# Altium PCB CPUEX-010.PcbDoc
Units mil, origin at the board's own origin, x right, y up, seen from the top; angles counter-clockwise.
Board outline 1270 x 1770 mil, 2 copper layers (Top Layer, Bottom Layer), stack 62.8 mil thick; 31 components, 46 nets, 150 pads, 15 vias.
Unrouted connection lines stored in the file: 57.
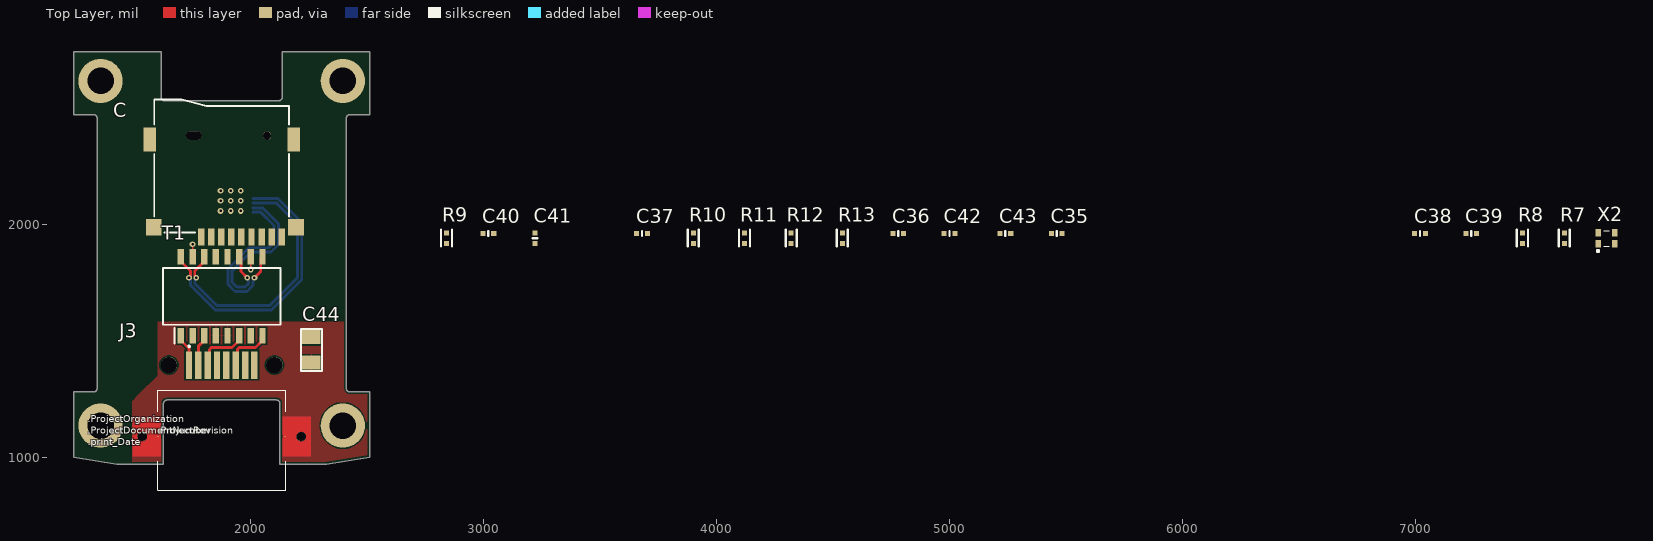
[diagram p0: Top Layer view]
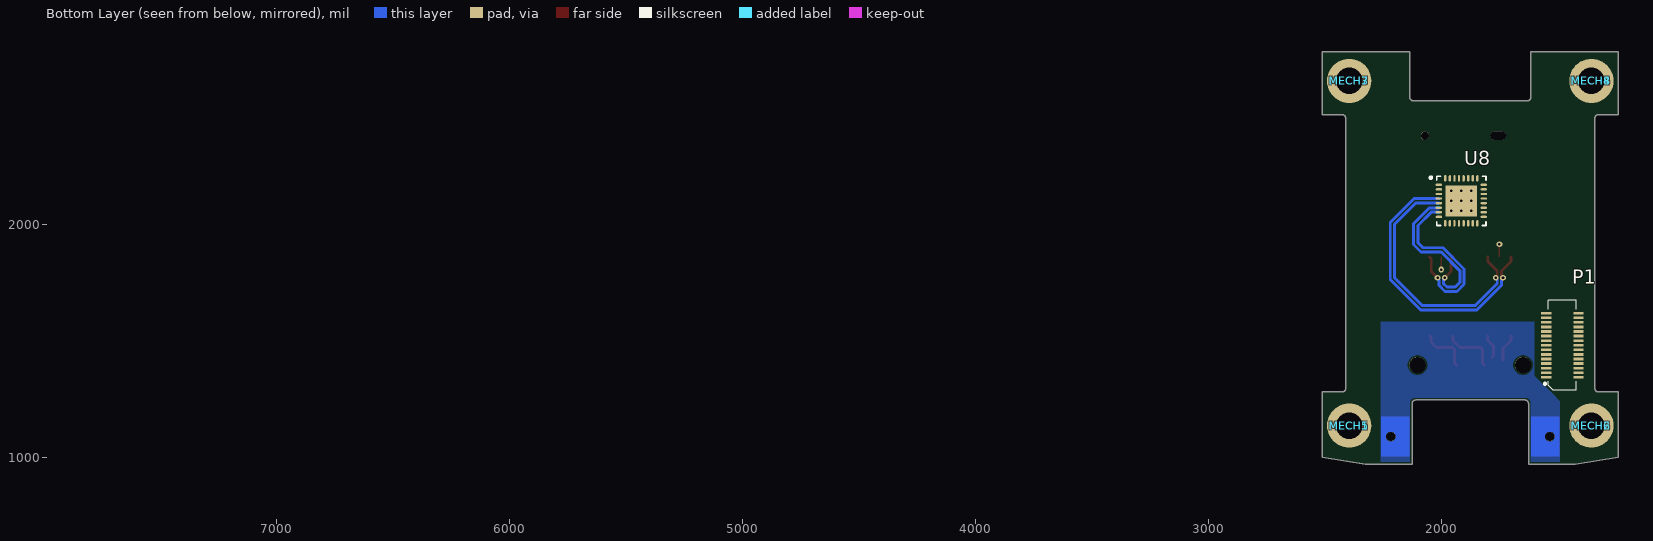
[diagram p1: Bottom Layer view, seen from below]

## Layer stack, top to bottom
Top Solder: solder mask 0.5, Solder Resist, Dk 3.5
Top Layer: signal copper 1.4
Dielectric 1: core 60, FR-4, Dk 4.6
Bottom Layer: signal copper 1.4
Bottom Solder: solder mask 0.5, Solder Resist, Dk 3.5

## Board outline
1240,1000 1240,1280 1325,1280 ccw(c1325,1295) 1340,1295 1340,2455 ccw(c1325,2455) 1325,2470 1240,2470 1240,2740 1615,2740 1615,2545 ccw(c1630,2545) 1630,2530 2120,2530 ccw(c2120,2545) 2135,2545 2135,2740 2510,2740 2510,2470 2425,2470 ccw(c2425,2455) 2410,2455 2410,1295 ccw(c2425,1295) 2425,1280 2510,1280 2510,1000 2325,970 2125,970 2125,1230 ccw(c2110,1230) 2110,1245 1640,1245 ccw(c1640,1230) 1625,1230 1625,970 1425,970

## Design rules (kind name [scope] priority, off if disabled: settings)
AssemblyTestPointUsage AssemblyTestPointUsage_1 [All] p2:
AssemblyTestpoint AssemblyTestpoint_1 [All] p2: testpointundercomponent=TRUE minsize=40 maxsize=100 preferedsize=60 minholesize=0 maxholesize=40 preferedholesize=32 testpointgrid=1 usegrid=TRUE gridtolerance=0.01 allowsidetop=TRUE allowsidebottom=TRUE
BoardOutlineClearance [All] p1: gap=10 ignorepadtopadclearanceinfootprint=FALSE
Clearance [All] p1: gap=6 ignorepadtopadclearanceinfootprint=FALSE except(0: Arc-Hole Track-Hole SMDPad-Hole THPad-Hole Via-Hole Fill-Hole Poly-Hole Region-Hole Text-Hole)
ComponentClearance [All] p1: gap=10 collisioncheckmode=3 verticalgap=50 showdistances=FALSE
DiffPairsRouting [All] p1: maxlimit=6 minlimit=6 mostfreqgap=6 toplayer_minwidth=12.57 toplayer_maxwidth=12.57 toplayer_prefwidth=14.24 bottomlayer_minwidth=12.57 bottomlayer_maxwidth=12.57 bottomlayer_prefwidth=14.24 impedanceprofiledriven=TRUE impedanceprofileid={3162B924-8DB4-4B85-B7C6-C3A51DCF2030} impedanceprofilevalue=100.000000 maxuncoupledlength=500
FabricationTestPointUsage FabricationTestPointUsage_1 [All] p2: valid=0 allowmultiple=FALSE
FabricationTestpoint FabricationTestpoint_1 [All] p2: side=3 testpointundercomponent=TRUE minsize=40 maxsize=100 preferedsize=60 minholesize=0 maxholesize=40 preferedholesize=32 testpointgrid=1 allowsidetop=TRUE allowsidebottom=TRUE usegrid=TRUE gridtolerance=0.01
Height Height_Bottom [TouchesRoom('BoardHeight_Bottom') and OnBottom and not ((Name='P1') or Name='Mech*' )] p1: minheight=0 maxheight=75 prefheight=0
Height Height_Top [TouchesRoom('BoardHeight_Top') and OnBottom] p2: minheight=0 maxheight=400 prefheight=0
HoleSize [All] p1: absolutevalues=TRUE maxlimit=130 minlimit=10 maxpercent=80.000 minpercent=20.000
MinimumSolderMaskSliver [All] p1: minsoldermaskwidth=3.94
PolygonConnect [All] p1: thpad.connectstyle=Relief thpad.reliefconductorwidth=6 thpad.reliefentries=4 thpad.polygonreliefangle="90 Angle" thpad.airgapwidth=6 smdpad.connectstyle=Relief smdpad.reliefconductorwidth=6 smdpad.reliefentries=4 smdpad.polygonreliefangle="90 Angle" smdpad.airgapwidth=6 via.connectstyle=Direct via.reliefconductorwidth=10 via.reliefentries=4 via.polygonreliefangle="90 Angle" via.airgapwidth=10
RoomDefinition BoardHeight_Bottom [False] p1: confinementstyle=ConfineIn formatcopy=TRUE lockcomponents=FALSE outline 1000,2750 2750,2750 2750,1000 1000,1000
RoomDefinition BoardHeight_Top [False] p2: confinementstyle=ConfineIn formatcopy=TRUE lockcomponents=FALSE outline 2750,2750 1000,2750 1000,1000 2750,1000
RoutingVias [All] p1: holewidth=10 width=25 viastyle="Through Hole" minholewidth=10 minwidth=25 maxholewidth=28 maxwidth=50
SilkToBoardRegionClearance SilkToBoardRegionClearance_1 [All] p2:
SilkToSilkClearance [All] p1: silktosilkclearance=2
SilkToSolderMaskClearance [IsPad] p1: minsilkscreentomaskgap=4 clearancetoexposedcopper=TRUE
SolderMaskExpansion [All] p1: expansion=1.97 istentingtop=FALSE
UnRoutedNet [All] p1: checkbadconnections=TRUE
Width "Schematic Width Constraint_3" [InNet('NetR7_1')] p1: maxlimit=10 minlimit=10 preferedwidth=10
Width "Schematic Width Constraint_2" [InNet('ETH_OSC')] p2: maxlimit=10 minlimit=10 preferedwidth=10
Width Width_1 [All] p3: maxlimit=100 minlimit=6 preferedwidth=10
22 further rules are at their usual default settings.

## Classes and differential pairs
differential pair TX: +TX_P -TX_N
differential pair TD: +TD_P -TD_N
differential pair RX: +RX_P -RX_N
differential pair RD: +RD_P -RD_N

## Components (designator, comment, footprint, x,y, rotation, side; value= is the part's Value field where it differs from the comment)
C "693071020811" 693071020811 1875,2250 r180 top (schematic designator J1)
C35 "0.10µF" SMD-0402C 5460,1960 r90 top
C36 "0.10µF" SMD-0402C 4780,1960 r90 top
C37 "0.10µF" SMD-0402C 3680,1960 r90 top
C38 "0.10µF" SMD-0402C 7020,1960 r90 top
C39 "10000pF" SMD-0402C 7240,1960 r90 top
C40 "0.10µF" SMD-0402C 3020,1960 r90 top
C41 "0.10µF" SMD-0402C 3220,1940 r0 top
C42 "0.10µF" SMD-0402C 5000,1960 r90 top
C43 "0.10µF" SMD-0402C 5240,1960 r90 top
C44 "C1206C102KGRACAUTO" SMD-1206C 2260,1460 r0 top value=1nF
J3 "2041126-1" TE_2041126-1 1875,1395 r0 top
MECH1 "94669A096" 94669A096 2395,1135 r90 bottom
MECH2 "94669A096" 94669A096 1355,1135 r90 bottom
MECH3 "94669A096" 94669A096 2395,2615 r90 bottom
MECH4 "94669A096" 94669A096 1355,2615 r90 bottom
MECH5 "90576A161" 90576A161 2395,1135 r180 bottom
MECH6 "90576A161" 90576A161 1355,1135 r180 bottom
MECH7 "90576A161" 90576A161 2395,2615 r180 bottom
MECH8 "90576A161" 90576A161 1355,2615 r180 bottom
P1 "501920-3001" 5019203001 1480,1480 r270 bottom
R7 "22" SMD-0402-RES 7640,1940 r0 top
R8 "1k" SMD-0402-RES 7460,1940 r0 top
R9 "60.4k" SMD-0402-RES 2840,1940 r0 top
R10 "75" SMD-0402-RES 3900,1940 r0 top
R11 "75" SMD-0402-RES 4120,1940 r0 top
R12 "75" SMD-0402-RES 4320,1940 r0 top
R13 "75" SMD-0402-RES 4540,1940 r0 top
T1 "PT61018AAPEL-S" SOIC127P930X590-16N 1875,1690 r90 top
U8 "KSZ8061RNBV" "QFN50P500X500X90_HS-33N (KSZ8061RNBV)" 1913.54,2100.16 r180 bottom
X2 "MC2016K25.0000C16ESH" MC2016 7820,1940 r0 top

## Footprints (in the part's own frame and the unit in brackets; to place one, negate y for a bottom-side part, rotate by r counter-clockwise, add the part's x,y. Pads: shape width x height; smd on the part's side, far side on the other; paste and mask are expansions set on the pad)
90576A161 [mil]
  body extent -98,-114 98,114, height 372
94669A096 [mil]
  body extent -89,-89 89,89, height 157
5019203001 [mm]
  rect 0.3x1.1 smd: 1(3.5,-1.75) 2(3.5,1.75) 3(3,-1.75) 4(3,1.75) 5(2.5,-1.75) 6(2.5,1.75) 7(2,-1.75) 8(2,1.75) 9(1.5,-1.75) 10(1.5,1.75) 11(1,-1.75) 12(1,1.75) 13(0.5,-1.75) 14(0.5,1.75) 15(0,-1.75) 16(0,1.75) 17(-0.5,-1.75) 18(-0.5,1.75) 19(-1,-1.75) 20(-1,1.75) 21(-1.5,-1.75) 22(-1.5,1.75) 23(-2,-1.75) 24(-2,1.75) 25(-2.5,-1.75) 26(-2.5,1.75) 27(-3,-1.75) 28(-3,1.75) 29(-3.5,-1.75) 30(-3.5,1.75)
  silkscreen extent -4.9,-2 4.9,1.55, body extent -4.9,-2.05 4.9,2.05, height 3.42
693071020811 [mm] "Micro SD Card Connector Push & Push - with Card Detection - 8 Pins"
  rect 0.7x1.9 smd: 1(2.25,7.75) 2(1.15,7.75) 3(0.05,7.75) 4(-1.05,7.75) 5(-2.15,7.75) 6(-3.25,7.75) 7(-4.35,7.75) 8(-5.45,7.75) 9(-6.55,7.75)
  rect 1.7x1.8 smd: 10(-8.1,6.7) 11(7.4,6.7)
  rect 1.4x2.6 smd: 12(-7.85,-2.9) 13(7.85,-2.9)
  round 0.9 hole 0.9 unplated: MH1(-4.95,-3.3)
  oval 1.7x0.9 hole 0.9 slot 1.7 at 0 deg unplated: MH2(3.05,-3.3)
  silkscreen extent -7.35,-7.25 7.35,7.25, body extent -8.2,-7.3 8.2,7.73, height 1.85
MC2016 [mm]
  rect 0.6x0.8 smd: 1(-0.9,-0.6) 2(0.9,-0.6) 3(0.9,0.6) 4(-0.9,0.6)
  silkscreen extent -1,-1.5 0.3,0.8, body extent -1,-0.8 1,0.8, height 0.4
"QFN50P500X500X90_HS-33N (KSZ8061RNBV)" [mm] "QFN, 32-Leads, Body 5.00x5.00mm, Pitch 0.50mm, Thermal Pad 3.40x3.40mm, IPC Medium Density"
  oval 0.7x0.25 smd: 1(-2.45,1.75) 2(-2.45,1.25) 3(-2.45,0.75) 4(-2.45,0.25) 5(-2.45,-0.25) 6(-2.45,-0.75) 7(-2.45,-1.25) 8(-2.45,-1.75) 17(2.45,-1.75) 18(2.45,-1.25) 19(2.45,-0.75) 20(2.45,-0.25) 21(2.45,0.25) 22(2.45,0.75) 23(2.45,1.25) 24(2.45,1.75)
  oval 0.25x0.7 smd: 9(-1.75,-2.45) 10(-1.25,-2.45) 11(-0.75,-2.45) 12(-0.25,-2.45) 13(0.25,-2.45) 14(0.75,-2.45) 15(1.25,-2.45) 16(1.75,-2.45) 25(1.75,2.45) 26(1.25,2.45) 27(0.75,2.45) 28(0.25,2.45) 29(-0.25,2.45) 30(-0.75,2.45) 31(-1.25,2.45) 32(-1.75,2.45)
  rect 3.4x3.4 smd: 33(0,0)
  silkscreen extent -3.45,-2.68 2.68,2.68, body extent -2.56,-2.56 2.56,2.56, height 0.9
SMD-0402-RES [mm]
  rect 0.55x0.55 smd: 1(0,0.584) 2(0,-0.584)
  silkscreen extent -0.6,-0.9 0.6,0.9, body extent -0.28,-0.57 0.27,0.58, height 0.41
SMD-0402C [mm]
  rect 0.55x0.55 smd: 1(0,0.584) 2(0,-0.584)
  silkscreen extent -0.25,0 0.25,0, body extent -0.25,-0.51 0.25,0.51, height 0.51
SMD-1206C [mil]
  rect 80x60 smd: 1(0,55) 2(0,-55)
  silkscreen extent -45,-90 45,90, body extent -31,-63 32,63, height 39
SOIC127P930X590-16N [mm]
  rect 1.7x0.7 smd: 1(-4.3,4.445) 2(-4.3,3.175) 3(-4.3,1.905) 4(-4.3,0.635) 5(-4.3,-0.635) 6(-4.3,-1.905) 7(-4.3,-3.175) 8(-4.3,-4.445) 9(4.3,-4.445) 10(4.3,-3.175) 11(4.3,-1.905) 12(4.3,-0.635) 13(4.3,0.635) 14(4.3,1.905) 15(4.3,3.175) 16(4.3,4.445)
  silkscreen extent -5.15,-6.4 3.1,6.4, body extent -4.65,-6.4 4.65,6.4, height 5.9
TE_2041126-1 [mm]
  rect 0.7x3 smd: 1(-3.57,0) 2(-2.55,0) 3(-1.53,0) 4(-0.51,0) 5(0.51,0) 6(1.53,0) 7(2.55,0) 8(3.57,0)
  round 1 hole 1 unplated: MH1(-8.675,-7.8) MH2(8.675,-7.8)
  rect 0.1x0.1 smd paste-1 mask+0: MH1(-6.925,-7.8) MH2(6.925,-7.8)
  round 1.8 hole 1.8 unplated: ""(-5.75,0) ""(5.75,0)
  Top Layer region: -6.65,-9.95 -9.7,-9.95 -9.7,-7.8 -9.7,-5.65 -6.65,-5.65 hole: -8.675,-7.3 -8.701,-7.301 -8.727,-7.303 -8.753,-7.306 -8.779,-7.311 -8.804,-7.317 -8.83,-7.324 -8.854,-7.333 -8.878,-7.343 -8.902,-7.354 -8.925,-7.367 -8.947,-7.381 -8.969,-7.395 -8.99,-7.411 -9.01,-7.428 -9.029,-7.446 -9.047,-7.465 -9.064,-7.485 -9.08,-7.506 -9.094,-7.528 -9.108,-7.55 -9.121,-7.573 -9.132,-7.597 -9.142,-7.621 -9.151,-7.645 -9.158,-7.671 -9.164,-7.696 -9.169,-7.722 -9.172,-7.748 -9.174,-7.774 -9.175,-7.8 -9.174,-7.826 -9.172,-7.852 -9.169,-7.878 -9.164,-7.904 -9.158,-7.929 -9.151,-7.955 -9.142,-7.979 -9.132,-8.003 -9.121,-8.027 -9.108,-8.05 -9.094,-8.072 -9.08,-8.094 -9.064,-8.115 -9.047,-8.135 -9.029,-8.154 -9.01,-8.172 -8.99,-8.189 -8.969,-8.205 -8.947,-8.219 -8.925,-8.233 -8.902,-8.246 -8.878,-8.257 -8.854,-8.267 -8.83,-8.276 -8.804,-8.283 -8.779,-8.289 -8.753,-8.294 -8.727,-8.297 -8.701,-8.299 -8.675,-8.3 -8.649,-8.299 -8.623,-8.297 -8.597,-8.294 -8.571,-8.289 -8.546,-8.283 -8.52,-8.276 -8.496,-8.267 -8.472,-8.257 -8.448,-8.246 -8.425,-8.233 -8.403,-8.219 -8.381,-8.205 -8.36,-8.189 -8.34,-8.172 -8.321,-8.154 -8.303,-8.135 -8.286,-8.115 -8.27,-8.094 -8.256,-8.072 -8.242,-8.05 -8.229,-8.027 -8.218,-8.003 -8.208,-7.979 -8.199,-7.955 -8.192,-7.929 -8.186,-7.904 -8.181,-7.878 -8.178,-7.852 -8.176,-7.826 -8.175,-7.8 -8.176,-7.774 -8.178,-7.748 -8.181,-7.722 -8.186,-7.696 -8.192,-7.671 -8.199,-7.645 -8.208,-7.621 -8.218,-7.597 -8.229,-7.573 -8.242,-7.55 -8.256,-7.528 -8.27,-7.506 -8.286,-7.485 -8.303,-7.465 -8.321,-7.446 -8.34,-7.428 -8.36,-7.411 -8.381,-7.395 -8.403,-7.381 -8.425,-7.367 -8.448,-7.354 -8.472,-7.343 -8.496,-7.333 -8.52,-7.324 -8.546,-7.317 -8.571,-7.311 -8.597,-7.306 -8.623,-7.303 -8.649,-7.301
  Top Layer region: 9.7,-7.8 9.7,-9.95 6.65,-9.95 6.65,-5.65 9.7,-5.65 hole: 8.675,-7.3 8.649,-7.301 8.623,-7.303 8.597,-7.306 8.571,-7.311 8.546,-7.317 8.52,-7.324 8.496,-7.333 8.472,-7.343 8.448,-7.354 8.425,-7.367 8.403,-7.381 8.381,-7.395 8.36,-7.411 8.34,-7.428 8.321,-7.446 8.303,-7.465 8.286,-7.485 8.27,-7.506 8.256,-7.528 8.242,-7.55 8.229,-7.573 8.218,-7.597 8.208,-7.621 8.199,-7.645 8.192,-7.671 8.186,-7.696 8.181,-7.722 8.178,-7.748 8.176,-7.774 8.175,-7.8 8.176,-7.826 8.178,-7.852 8.181,-7.878 8.186,-7.904 8.192,-7.929 8.199,-7.955 8.208,-7.979 8.218,-8.003 8.229,-8.027 8.242,-8.05 8.256,-8.072 8.27,-8.094 8.286,-8.115 8.303,-8.135 8.321,-8.154 8.34,-8.172 8.36,-8.189 8.381,-8.205 8.403,-8.219 8.425,-8.233 8.448,-8.246 8.472,-8.257 8.496,-8.267 8.52,-8.276 8.546,-8.283 8.571,-8.289 8.597,-8.294 8.623,-8.297 8.649,-8.299 8.675,-8.3 8.701,-8.299 8.727,-8.297 8.753,-8.294 8.779,-8.289 8.804,-8.283 8.83,-8.276 8.854,-8.267 8.878,-8.257 8.902,-8.246 8.925,-8.233 8.947,-8.219 8.969,-8.205 8.99,-8.189 9.01,-8.172 9.029,-8.154 9.047,-8.135 9.064,-8.115 9.08,-8.094 9.094,-8.072 9.108,-8.05 9.121,-8.027 9.132,-8.003 9.142,-7.979 9.151,-7.955 9.158,-7.929 9.164,-7.904 9.169,-7.878 9.172,-7.852 9.174,-7.826 9.175,-7.8 9.174,-7.774 9.172,-7.748 9.169,-7.722 9.164,-7.696 9.158,-7.671 9.151,-7.645 9.142,-7.621 9.132,-7.597 9.121,-7.573 9.108,-7.55 9.094,-7.528 9.08,-7.506 9.064,-7.485 9.047,-7.465 9.029,-7.446 9.01,-7.428 8.99,-7.411 8.969,-7.395 8.947,-7.381 8.925,-7.367 8.902,-7.354 8.878,-7.343 8.854,-7.333 8.83,-7.324 8.804,-7.317 8.779,-7.311 8.753,-7.306 8.727,-7.303 8.701,-7.301
  Bottom Layer region: -6.65,-9.95 -9.7,-9.95 -9.7,-7.8 -9.7,-5.65 -6.65,-5.65 hole: -8.675,-7.3 -8.701,-7.301 -8.727,-7.303 -8.753,-7.306 -8.779,-7.311 -8.804,-7.317 -8.83,-7.324 -8.854,-7.333 -8.878,-7.343 -8.902,-7.354 -8.925,-7.367 -8.947,-7.381 -8.969,-7.395 -8.99,-7.411 -9.01,-7.428 -9.029,-7.446 -9.047,-7.465 -9.064,-7.485 -9.08,-7.506 -9.094,-7.528 -9.108,-7.55 -9.121,-7.573 -9.132,-7.597 -9.142,-7.621 -9.151,-7.645 -9.158,-7.671 -9.164,-7.696 -9.169,-7.722 -9.172,-7.748 -9.174,-7.774 -9.175,-7.8 -9.174,-7.826 -9.172,-7.852 -9.169,-7.878 -9.164,-7.904 -9.158,-7.929 -9.151,-7.955 -9.142,-7.979 -9.132,-8.003 -9.121,-8.027 -9.108,-8.05 -9.094,-8.072 -9.08,-8.094 -9.064,-8.115 -9.047,-8.135 -9.029,-8.154 -9.01,-8.172 -8.99,-8.189 -8.969,-8.205 -8.947,-8.219 -8.925,-8.233 -8.902,-8.246 -8.878,-8.257 -8.854,-8.267 -8.83,-8.276 -8.804,-8.283 -8.779,-8.289 -8.753,-8.294 -8.727,-8.297 -8.701,-8.299 -8.675,-8.3 -8.649,-8.299 -8.623,-8.297 -8.597,-8.294 -8.571,-8.289 -8.546,-8.283 -8.52,-8.276 -8.496,-8.267 -8.472,-8.257 -8.448,-8.246 -8.425,-8.233 -8.403,-8.219 -8.381,-8.205 -8.36,-8.189 -8.34,-8.172 -8.321,-8.154 -8.303,-8.135 -8.286,-8.115 -8.27,-8.094 -8.256,-8.072 -8.242,-8.05 -8.229,-8.027 -8.218,-8.003 -8.208,-7.979 -8.199,-7.955 -8.192,-7.929 -8.186,-7.904 -8.181,-7.878 -8.178,-7.852 -8.176,-7.826 -8.175,-7.8 -8.176,-7.774 -8.178,-7.748 -8.181,-7.722 -8.186,-7.696 -8.192,-7.671 -8.199,-7.645 -8.208,-7.621 -8.218,-7.597 -8.229,-7.573 -8.242,-7.55 -8.256,-7.528 -8.27,-7.506 -8.286,-7.485 -8.303,-7.465 -8.321,-7.446 -8.34,-7.428 -8.36,-7.411 -8.381,-7.395 -8.403,-7.381 -8.425,-7.367 -8.448,-7.354 -8.472,-7.343 -8.496,-7.333 -8.52,-7.324 -8.546,-7.317 -8.571,-7.311 -8.597,-7.306 -8.623,-7.303 -8.649,-7.301
  Bottom Layer region: 9.7,-7.8 9.7,-9.95 6.65,-9.95 6.65,-5.65 9.7,-5.65 hole: 8.675,-7.3 8.649,-7.301 8.623,-7.303 8.597,-7.306 8.571,-7.311 8.546,-7.317 8.52,-7.324 8.496,-7.333 8.472,-7.343 8.448,-7.354 8.425,-7.367 8.403,-7.381 8.381,-7.395 8.36,-7.411 8.34,-7.428 8.321,-7.446 8.303,-7.465 8.286,-7.485 8.27,-7.506 8.256,-7.528 8.242,-7.55 8.229,-7.573 8.218,-7.597 8.208,-7.621 8.199,-7.645 8.192,-7.671 8.186,-7.696 8.181,-7.722 8.178,-7.748 8.176,-7.774 8.175,-7.8 8.176,-7.826 8.178,-7.852 8.181,-7.878 8.186,-7.904 8.192,-7.929 8.199,-7.955 8.208,-7.979 8.218,-8.003 8.229,-8.027 8.242,-8.05 8.256,-8.072 8.27,-8.094 8.286,-8.115 8.303,-8.135 8.321,-8.154 8.34,-8.172 8.36,-8.189 8.381,-8.205 8.403,-8.219 8.425,-8.233 8.448,-8.246 8.472,-8.257 8.496,-8.267 8.52,-8.276 8.546,-8.283 8.571,-8.289 8.597,-8.294 8.623,-8.297 8.649,-8.299 8.675,-8.3 8.701,-8.299 8.727,-8.297 8.753,-8.294 8.779,-8.289 8.804,-8.283 8.83,-8.276 8.854,-8.267 8.878,-8.257 8.902,-8.246 8.925,-8.233 8.947,-8.219 8.969,-8.205 8.99,-8.189 9.01,-8.172 9.029,-8.154 9.047,-8.135 9.064,-8.115 9.08,-8.094 9.094,-8.072 9.108,-8.05 9.121,-8.027 9.132,-8.003 9.142,-7.979 9.151,-7.955 9.158,-7.929 9.164,-7.904 9.169,-7.878 9.172,-7.852 9.174,-7.826 9.175,-7.8 9.174,-7.774 9.172,-7.748 9.169,-7.722 9.164,-7.696 9.158,-7.671 9.151,-7.645 9.142,-7.621 9.132,-7.597 9.121,-7.573 9.108,-7.55 9.094,-7.528 9.08,-7.506 9.064,-7.485 9.047,-7.465 9.029,-7.446 9.01,-7.428 8.99,-7.411 8.969,-7.395 8.947,-7.381 8.925,-7.367 8.902,-7.354 8.878,-7.343 8.854,-7.333 8.83,-7.324 8.804,-7.317 8.779,-7.311 8.753,-7.306 8.727,-7.303 8.701,-7.301
  silkscreen extent -7,-13.65 7,2.13, body extent -8.77,-13.65 8.78,1.05, height 8.66

## Part data
C: "WR-CRD Micro SD Card Connector Push & Push", Contact Resistance=100mOhm, Operating Temperature="-40 to +85degC", Rated Current=0.5A, Withstanding Voltage=500VAC, Working Voltage=30VAC, ComponentLink1Description=Manufacturer, ComponentLink1URL=http://www.we-online.de, ComponentLink2Description=Datasheet, ComponentLink2URL=https://katalog.we-online.com/em/datasheet/693071020811.pdf, Gender=Socket, Mounting Technology=SMT, Packaging="Tape and Reel", Part Number=693071020811, Pin Number=8, Published Date="November 2019", Publisher="Wurth Elektronik", Type="Push & Push", Unit Price (USD)=3.71
C35 C36 C37 C38 C40 C41 C42 C43: library part GCM155R71C104KA55D, "CAP CER 0.1UF 16V X7R 0402", Digi-Key Part Number=490-4759-1-ND, Manufacturer="Murata Electronics North America", Operating Temperature="-55°C ~ 125°C", Package / Case="0402 (1005 Metric)", Ratings=AEC-Q200, Temperature Coefficient=X7R, Tolerance=±10%, Voltage=16V, @ qty=0, Applications=Automotive, Datasheets=http://www.murata.com/~/media/webrenewal/support/library/catalog/products/capacitor/mlcc/c03e.ashx, Factory Stock=0, Features=-, Height - Seated (Max)=-, Image=//media.digikey.com/Renders/Murata%20Renders/ZRB-SERIES-0402.jpg, Lead Spacing=-, Lead Style=-, Minimum Quantity=1, Mounting Type="Surface Mount, MLCC", Packaging="Cut Tape (CT)", Part Number=GCM155R71C104KA55D, Part Status=Active, Quantity Available=734194, Series=GCM, Size / Dimension="0.039\" L x 0.020\" W (1.00mm x 0.50mm)", Thickness (Max)="0.022\" (0.55mm)", Unit Price (USD)=0.1
C39: library part GCM155R71E103KA37D, "CAP CER 10000PF 25V X7R 0402", Digi-Key Part Number=490-6043-1-ND, Manufacturer="Murata Electronics North America", Operating Temperature="-55°C ~ 125°C", Package / Case="0402 (1005 Metric)", Ratings=AEC-Q200, Temperature Coefficient=X7R, Tolerance=±10%, Voltage=25V, @ qty=0, Applications=Automotive, Datasheets=http://www.murata.com/~/media/webrenewal/support/library/catalog/products/capacitor/mlcc/c03e.ashx, Factory Stock=0, Features=-, Height - Seated (Max)=-, Image=//media.digikey.com/Renders/Murata%20Renders/ZRB-SERIES-0402.jpg, Lead Spacing=-, Lead Style=-, Minimum Quantity=1, Mounting Type="Surface Mount, MLCC", Packaging="Cut Tape (CT)", Part Number=GCM155R71E103KA37D, Part Status=Active, Quantity Available=128782, Series=GCM, Size / Dimension="0.039\" L x 0.020\" W (1.00mm x 0.50mm)", Thickness (Max)="0.022\" (0.55mm)", Unit Price (USD)=0.1
C44: Voltage=2kV, Unit Price (USD)=0.26
J3: "Connector", Unit Price (USD)=2.20
P1: "Connector", Manufacturer_Name=Molex, Datasheet Link=https://www.molex.com/pdm_docs/sd/5019203001_sd.pdf, Height=3.62mm, Manufacturer_Part_Number=501920-3001, System=Connector, Unit Price (USD)=2.86
R7: library part ERJ-2RKF22R0X, "RES SMD 22 OHM 1% 1/10W 0402", Digi-Key Part Number=P22.0LCT-ND, Manufacturer="Panasonic Electronic Components", Operating Temperature="-55°C ~ 155°C", Package / Case="0402 (1005 Metric)", Power (Watts)="0.1W, 1/10W", Supplier Device Package=0402, Temperature Coefficient=±100ppm/°C, Tolerance=±1%, @ qty=1500, Composition="Thick Film", Datasheets=http://industrial.panasonic.com/www-cgi/jvcr13pz.cgi?E+PZ+3+AOA0002+ERJ2RKF22R0X+7+WW, Factory Stock=0, Failure Rate=-, Features="Automotive AEC-Q200", Height - Seated (Max)="0.016\" (0.40mm)", Image=//media.digikey.com/Photos/Panasonic%20Photos/ERJ-PA2-Series.jpg, Minimum Quantity=1, Number of Terminations=2, Packaging="Cut Tape (CT)", Part Number=ERJ-2RKF22R0X, Part Status=Active, Quantity Available=620432, Series=ERJ, Size / Dimension="0.039\" L x 0.020\" W (1.00mm x 0.50mm)", Unit Price (USD)=0.00496
R8: library part ERJ-2GEJ102X, "RES SMD 1K OHM 5% 1/10W 0402", Digi-Key Part Number=P1.0KJCT-ND, Manufacturer="Panasonic Electronic Components", Operating Temperature="-55°C ~ 155°C", Package / Case="0402 (1005 Metric)", Power (Watts)="0.1W, 1/10W", Supplier Device Package=0402, Temperature Coefficient=±200ppm/°C, Tolerance=±5%, @ qty=1500, Composition="Thick Film", Datasheets=http://industrial.panasonic.com/www-cgi/jvcr13pz.cgi?E+PZ+3+AOA0001+ERJ2GEJ102X+7+WW, Factory Stock=0, Failure Rate=-, Features="Automotive AEC-Q200", Height - Seated (Max)="0.016\" (0.40mm)", Image=//media.digikey.com/Photos/Panasonic%20Photos/ERJ-PA2-Series.jpg, Minimum Quantity=1, Number of Terminations=2, Packaging="Cut Tape (CT)", Part Number=ERJ-2GEJ102X, Part Status=Active, Quantity Available=1939857, Series=ERJ, Size / Dimension="0.039\" L x 0.020\" W (1.00mm x 0.50mm)", Unit Price (USD)=0.00350
R9: library part ERJ-2RKF6042X, "RES SMD 60.4K OHM 1% 1/10W 0402", Digi-Key Part Number=P60.4KLCT-ND, Manufacturer="Panasonic Electronic Components", Operating Temperature="-55°C ~ 155°C", Package / Case="0402 (1005 Metric)", Power (Watts)="0.1W, 1/10W", Supplier Device Package=0402, Temperature Coefficient=±100ppm/°C, Tolerance=±1%, @ qty=1500, Composition="Thick Film", Datasheets=http://industrial.panasonic.com/www-cgi/jvcr13pz.cgi?E+PZ+3+AOA0002+ERJ2RKF6042X+7+WW, Factory Stock=0, Failure Rate=-, Features="Automotive AEC-Q200", Height - Seated (Max)="0.016\" (0.40mm)", Image=//media.digikey.com/Photos/Panasonic%20Photos/ERJ-PA2-Series.jpg, Minimum Quantity=1, Number of Terminations=2, Packaging="Cut Tape (CT)", Part Number=ERJ-2RKF6042X, Part Status=Active, Quantity Available=237593, Series=ERJ, Size / Dimension="0.039\" L x 0.020\" W (1.00mm x 0.50mm)", Unit Price (USD)=0.00496
R10 R11 R12 R13: library part ERJ-2GEJ750X, "RES SMD 75 OHM 5% 1/10W 0402", Digi-Key Part Number=P75JCT-ND, Manufacturer="Panasonic Electronic Components", Operating Temperature="-55°C ~ 155°C", Package / Case="0402 (1005 Metric)", Power (Watts)="0.1W, 1/10W", Supplier Device Package=0402, Temperature Coefficient=±200ppm/°C, Tolerance=±5%, @ qty=1500, Composition="Thick Film", Datasheets=http://industrial.panasonic.com/www-cgi/jvcr13pz.cgi?E+PZ+3+AOA0001+ERJ2GEJ750X+7+WW, Factory Stock=0, Failure Rate=-, Features="Automotive AEC-Q200", Height - Seated (Max)="0.016\" (0.40mm)", Image=//media.digikey.com/Photos/Panasonic%20Photos/ERJ-PA2-Series.jpg, Minimum Quantity=1, Number of Terminations=2, Packaging="Cut Tape (CT)", Part Number=ERJ-2GEJ750X, Part Status=Active, Quantity Available=120738, Series=ERJ, Size / Dimension="0.039\" L x 0.020\" W (1.00mm x 0.50mm)", Unit Price (USD)=0.00350
T1: "Transformer", Manufacturer_Name=Bourns, Datasheet Link=http://www.bourns.com/docs/Product-Datasheets/pt61018aapel-s.pdf?sfvrsn=2, Height=5.9mm, Manufacturer_Part_Number=PT61018AAPEL-S, Unit Price (USD)=4.63
MECH1 MECH2 MECH3 MECH4: Unit Price (USD)=0.41
MECH5 MECH6 MECH7 MECH8: Unit Price (USD)=0.27
U8: Unit Price (USD)=2.17
X2: Unit Price (USD)=2.15

## Free pads (board coordinates)
  round 190 hole 114.17: 0(1355,1135) 0(1355,2615) 0(2395,1135) 0(2395,2615)

## Via types
v1: diameter 25, hole 11, Top Layer to Bottom Layer, 15 vias

## Nets (pads, with @x,y where several pads share a name; then routed paths per layer and width w, separated by ;. In a path a pad name is that pad's centre, name@x,y a point inside that pad or via, vN(x,y) a via of type N, cw(c..) or ccw(c..) an arc to the next point about the centre after c; other vN are vias at no path point)
+1.2V: C40.2 C41.2 U8.9 U8.30
+3.3V: C36.2 C38.2 C39.2 P1.23 P1.25 R8.2 U8.15 X2.4
ETH_GND: C44.2 J3.MH1 J3.MH2 T1.4 T1.5 | length 83.4
  Top Layer w10: 2196.85,1163.15 2197.64,1162.36 2197.64,1107.62 2216.54,1088.72 J3.MH2@2216.54,1087.91
ETH_INT: P1.24 U8.32
ETH_MDC: P1.18 U8.10
ETH_MDIO: P1.20 U8.11
ETH_OSC: R7.2 U8.1
ETH_R\E\S\E\T\: P1.22
ETH_RX0: P1.12 U8.17
ETH_RX1: P1.14 U8.18
ETH_RXDV: P1.10 U8.13
ETH_RXER: P1.16 U8.12
ETH_SIGDET: P1.26 U8.29
ETH_TX0: P1.6 U8.22
ETH_TX1: P1.8 U8.23
ETH_TXCK: P1.2 U8.19
ETH_TXEN: P1.4 U8.21
GND: C35.1 C36.1 C37.1 C38.1 C39.1 C40.1 C41.1 C42.1 C43.1 P1.28 P1.30 R9.2 T1.12 T1.13 U8.25 U8.26 U8.33 X2.2
  other v1: 1870.24,2056.85 1913.54,2056.85 1956.85,2056.85 1870.24,2100.16 1913.54,2100.16 1956.85,2100.16 1870.24,2143.46 1913.54,2143.46 1956.85,2143.46
MCCDA: P1.3
MCCK: P1.1
MCDA0: P1.5
MCDA1: P1.7
MCDA2: P1.9
MCDA3: P1.11
NetC35_2: C35.2 U8.3
NetC37_2: C37.2 U8.8
NetC42_2: C42.2 T1.15 | length 54.3
  Top Layer w6: T1.15 v1(1750,1913.58)
NetC43_2: C43.2 T1.10 | length 54.3
  Top Layer w6: v1(2000,1805) T1.10
NetC44_1: C44.1 R10.1 R11.1 R12.1 R13.1
NetJ3_4: J3.4 J3.5 R12.2
NetJ3_7: J3.7 J3.8 R13.2
NetR7_1: R7.1 X2.3
NetR8_1: R8.1 X2.1
NetR9_1: R9.1 U8.31
NetR10_2: R10.2 T1.7
NetR11_2: R11.2 T1.2
RD_N: J3.6 T1.8 | length 214.2
  Top Layer w12.57: J3.6 1942.73,1402.49 1942.73,1462.63 1950.09,1470 2020,1470 2042.51,1492.51 2042.51,1513.22 T1.8
RD_P: J3.3 T1.6 | length 233.8
  Top Layer w12.57: J3.3 1822.26,1402.49 1822.26,1462.26 1830,1470 1918.98,1470 1950,1501.02 T1.6
RX_N: T1.9 U8.7 | length 768.7
  Top Layer w12.57: v1(2015.5,1770) 2042.51,1797.01 2042.51,1851.8 T1.9
  Bottom Layer w12.57: U8.7 2010.56,2051.5 2042.64,2051.5 2100,1994.14 2100,1920 2078.57,1898.57 1992.31,1898.57 1901.43,1807.69 1901.43,1742.31 1932.31,1711.43 1983.19,1711.43 2009.29,1737.52 2009.29,1760.42 2015.5,1766.64 v1(2015.5,1770)
RX_P: T1.11 U8.6 | length 737.9
  Top Layer w12.57: T1.11 1957.49,1851.8 1957.49,1797.01 v1(1984.5,1770)
  Bottom Layer w12.57: v1(1984.5,1770) 1984.5,1766.64 1990.71,1760.42 1990.71,1745.21 1975.5,1730 1940,1730 1920,1750 1920,1800 2000,1880 2086.27,1880 2118.57,1912.31 2118.57,2001.83 2050.33,2070.07 2010.56,2070.07 U8.6
SCL: P1.15
SDA: P1.13
TD_N: J3.2 T1.3 | length 106.8
  Top Layer w12.57: J3.2@1782.1,1427.52 1774.61,1435.01 1774.61,1475.63 1800,1501.02 T1.3
TD_P: J3.1 T1.1 | length 117.3
  Top Layer w12.57: T1.1 1700,1501.02 1734.45,1466.57 J3.1@1734.45,1417.64
TX_N: T1.14 U8.5 | length 1111.7
  Top Layer w12.57: v1@1759.29,1779.58 1759.29,1798.89 1800,1839.61 T1.14
  Bottom Layer w12.57: v1(1765.5,1770) 1765.5,1766.64 1759.29,1760.42 1759.29,1745.21 1854.5,1650 2080,1650 2200,1770 2200,2000 2109.13,2090.87 2010.56,2090.87 U8.5
TX_P: T1.16 U8.4 | length 1204
  Top Layer w12.57: T1.16 1700,1839.61 1740.71,1798.89 v1@1740.71,1779.58
  Bottom Layer w12.57: v1(1734.5,1770) 1734.5,1766.64 1740.71,1760.42 1740.71,1737.52 1846.81,1631.43 2087.69,1631.43 2218.57,1762.31 2218.57,2007.69 2116.82,2109.44 2010.56,2109.44 U8.4
pads on no net: C.1 C.2 C.3 C.4 C.5 C.6 C.7 C.8 C.9 C.10 C.11 C.12 C.13 C.MH1 C.MH2 J3. P1.17 P1.19 P1.21 P1.27 P1.29 U8.2 U8.14 U8.16 U8.20 U8.24 U8.27 U8.28

## Polygon pours and split planes (outlines as drawn)
ETH_GND on Top Layer "ETH_GND_L01_P012" (solid, pour order 12): 1490,1240 1520.87,1270.87 1600,1350 1600,1580 2520,1580 2520,960 1490,960
ETH_GND on Bottom Layer "ETH_GND_L02_P013" (solid, pour order 13): 1490,1240 1520.87,1270.87 1600,1350 1600,1580 2260,1580 2260,960 1490,960

## Silkscreen, mask and mechanical layers (free items; w line width, h text height)
Top Overlay:
  text ".ProjectOrganization" at 1300,1150 h30
  text ".ProjectDocumentNumber" at 1300,1100 h30
  text ".ProjectRevision" at 1600,1100 h30
  text ".print_Date" at 1300,1050 h30
Outline:
  the board outline again, w5

## Text inside footprints (layer, text, board x,y; h text height)
J3: 3D Top "PCB EDGE" at 1824.91,1244.73 h19.72; 3D Top "PCB EDGE" at 2200.15,919.79 h19.69